# Altium PCB RS485_XBus_Mini.PcbDoc
Units mm, origin at the board's own origin, x right, y up, seen from the top; angles counter-clockwise.
Board outline 48.65 x 24.22 mm, 2 copper layers (Top Layer, Bottom Layer); 65 components, 46 nets, 177 pads, 65 vias.
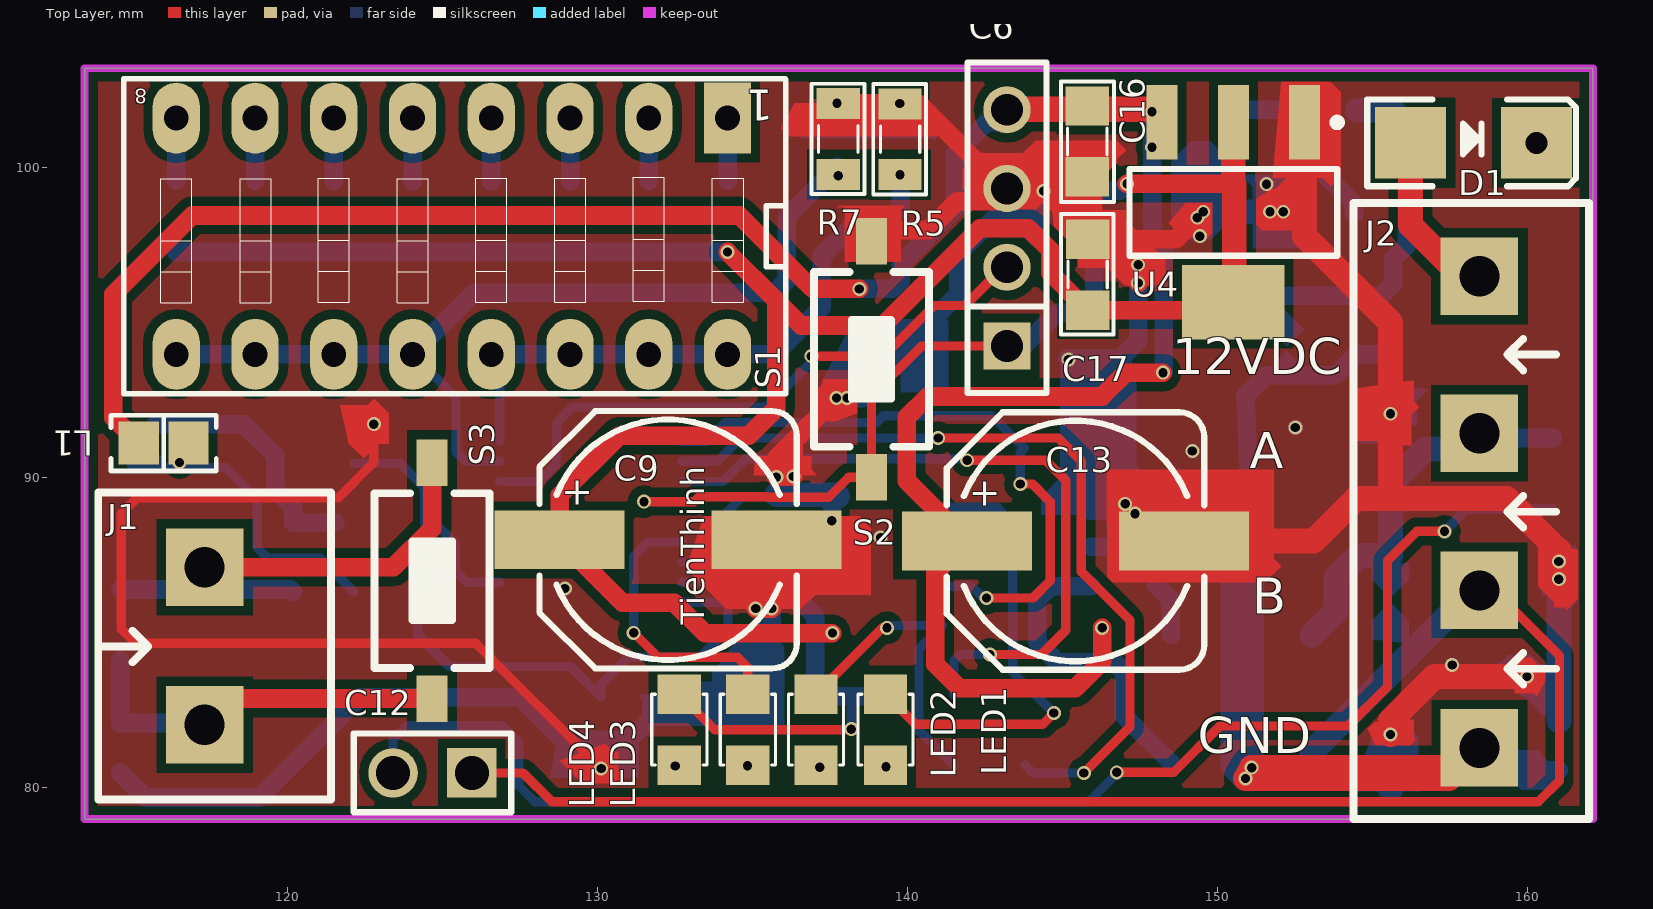
[diagram p0: Top Layer view]
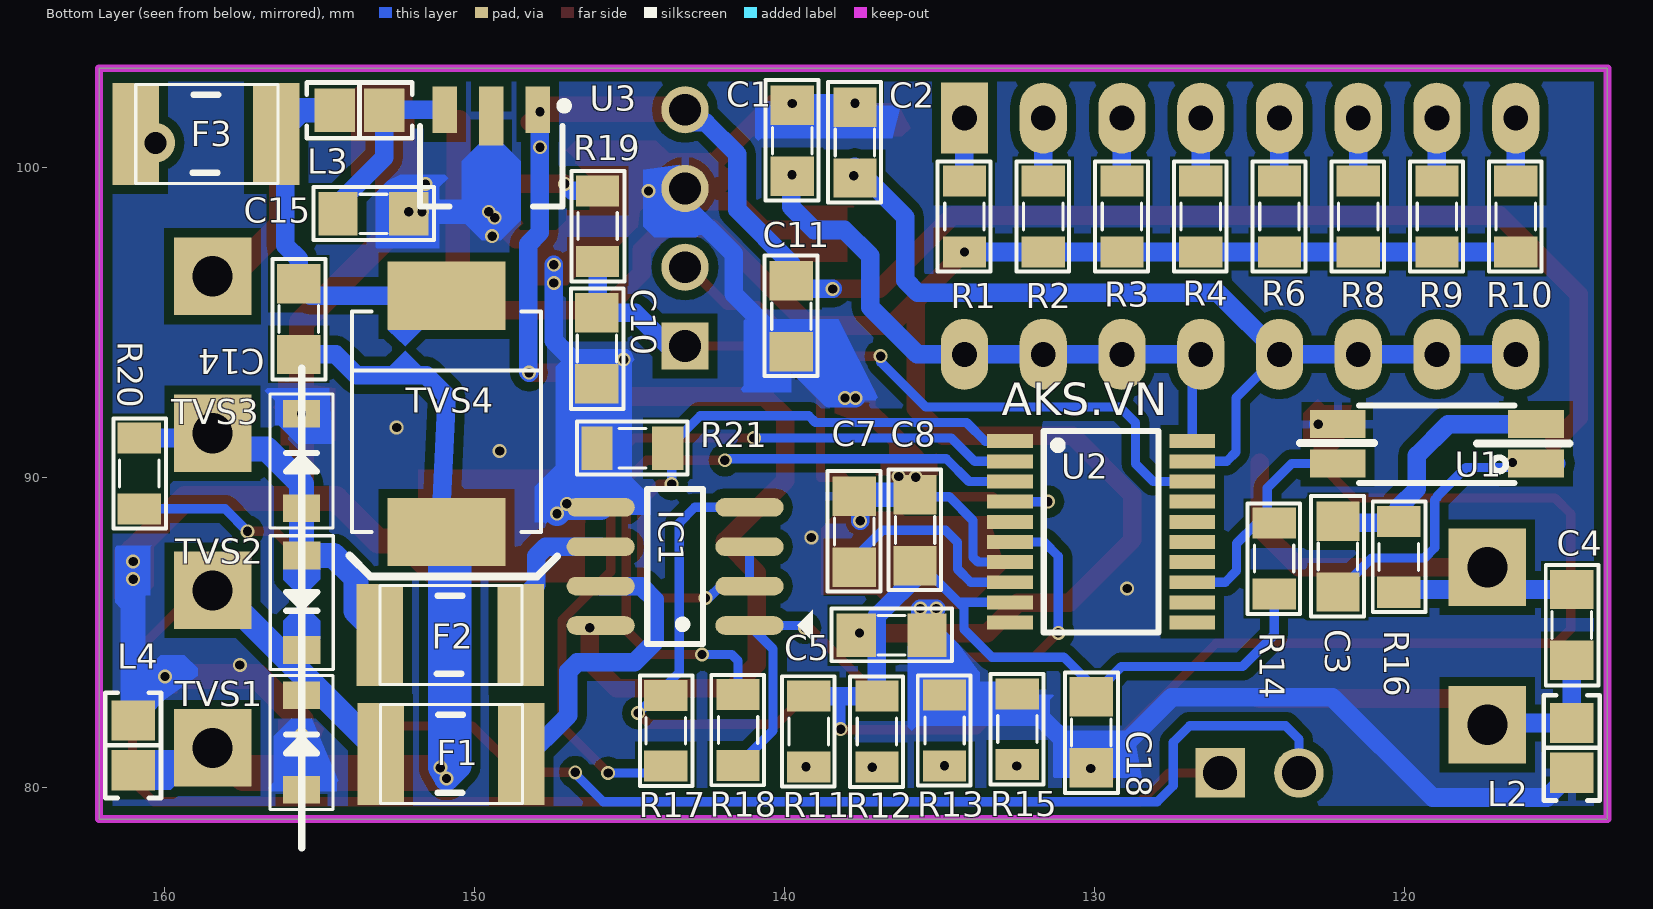
[diagram p1: Bottom Layer view, seen from below]
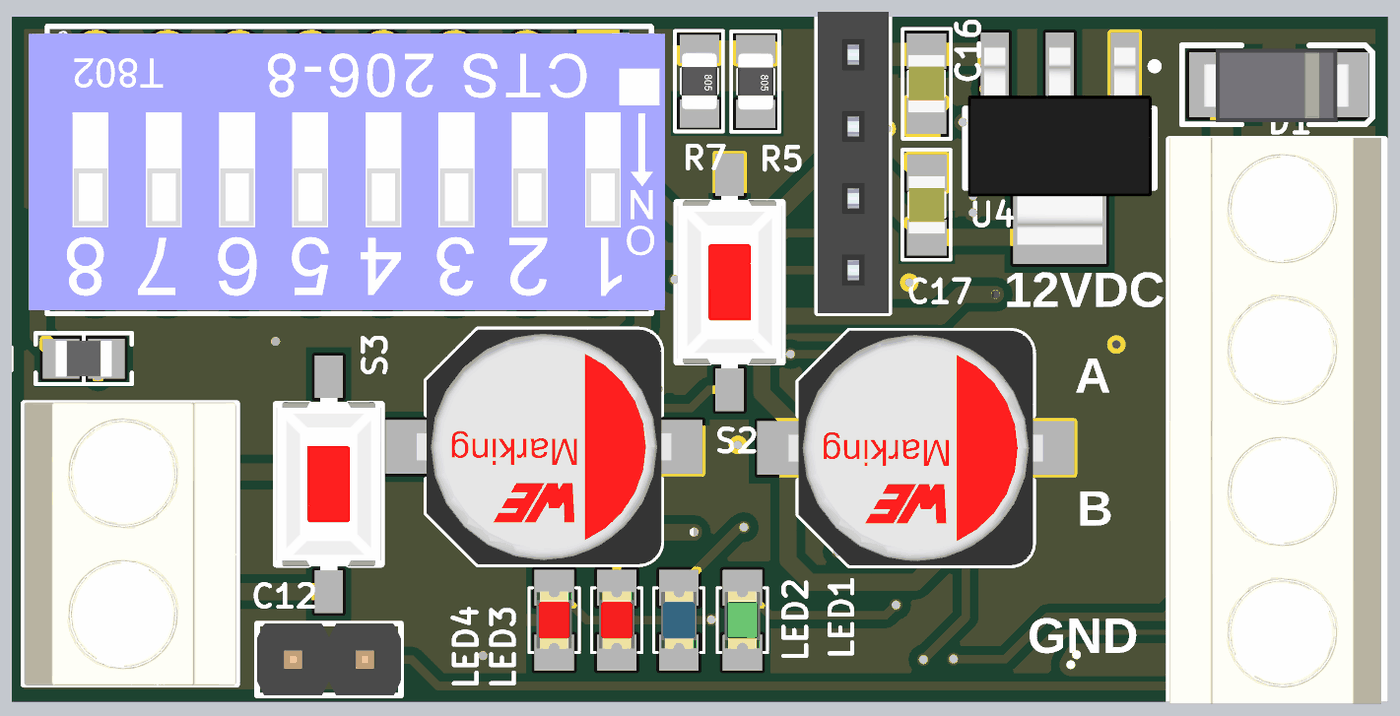
[diagram p2: 3D render of the assembled board from above, using the file's embedded part models]
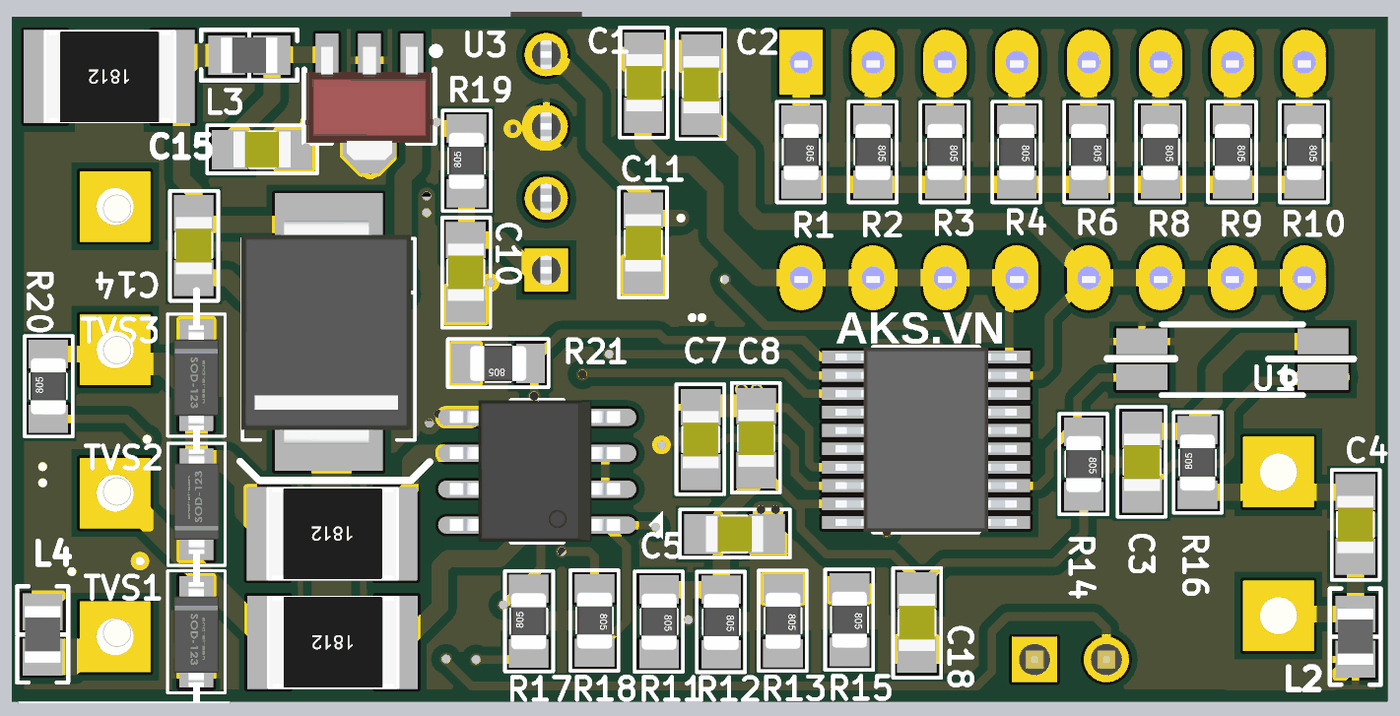
[diagram p3: 3D render of the assembled board from below, using the file's embedded part models]

## Layer stack, top to bottom
Top Solder: solder mask 0.0102, Solder Resist, Dk 3.5
Top Layer: signal copper 0.0356
Dielectric 1: dielectric 0.32, FR-4, Dk 4.8
Bottom Layer: signal copper 0.0356
Bottom Solder: solder mask 0.0102, Solder Resist, Dk 3.5

## Board outline
113.46,78.98 162.108,78.98 162.108,103.199 113.46,103.199

## Design rules (kind name [scope] priority, off if disabled: settings)
Clearance [All] p1: gap=0.2 ignorepadtopadclearanceinfootprint=FALSE
PolygonConnect [All] p1: connectstyle=Relief reliefconductorwidth=0.254 reliefentries=4 polygonreliefangle="90 Angle" airgapwidth=0.254
RoutingVias [All] p1: holewidth=0.3 width=0.45 viastyle="Through Hole" minholewidth=0.3 minwidth=0.45 maxholewidth=0.8 maxwidth=1.27
SolderMaskExpansion [All] p1: expansion=0.102
Width [All] p1: maxlimit=0.8 minlimit=0.3 preferedwidth=0.6
30 further rules are at their usual default settings.

## Components (designator, comment, footprint, x,y, rotation, side; value= is the part's Value field where it differs from the comment)
C1 "104" SM-0805 139.75,100.86 r270 bottom value=103
C2 "104" SM-0805 137.73,100.8 r270 bottom value=103
C3 "105" SM-0805 122.15,87.45 r270 bottom value=103
C4 "105" SM-0805 114.61,85.243 r90 bottom value=103
C5 "105" SM-0805 136.55,84.91 r0 bottom value=103
C6 "JP4" JP4-C1T 143.21,94.24 r90 top
C7 "105" SM-0805 137.75,88.25 r270 bottom value=103
C8 "105" SM-0805 135.79,88.3 r270 bottom value=103
C9 "330uF 16v" WCAP-AS5H_8x10.5 132.28,87.99 r0 top value=330uF
C10 "104" SM-0805 146.053,94.163 r90 bottom value=103
C11 "104" SM-0805 139.78,95.2 r270 bottom value=103
C12 "JP2" JP2-D1T 125.95,80.47 r180 top
C13 "330uF 16v" WCAP-AS5H_8x10.5 145.42,87.95 r0 top value=330uF
C14 "104" SM-0805 155.67,95.11 r90 bottom value=103
C15 "104" SM-0805 153.26,98.5 r0 bottom value=103
C16 "104" SM-0805 145.796,100.838 r90 top locked value=103
C17 "104" SM-0805 145.81,96.54 r270 top locked value=103
C18 "104" SM-0805 130.11,81.78 r90 bottom value=103
D1 "Diode" DIO-SMD-106 158.26,100.79 r180 top locked
F1 "FUSE" RES-SMD-1812 150.49,81.08 r0 bottom
F2 "FUSE" RES-SMD-1812 150.51,84.92 r0 bottom
F3 "FUSE" RES-SMD-1812 158.386,101.08 r0 bottom
IC1 "MAX485" SO-8 143.53,87.13 r0 bottom
J1 "KF2" KF2-5.08 117.33,84.56 r90 top locked
J2 "KF4" KF4-5.08 158.45,81.275 r90 top
L1 "1.5uH" "FER 0805/2012" 116.01,91.11 r180 top
L2 "1.5uH" "FER 0805/2012" 114.61,81.28 r90 bottom
L3 "1.5uH" "FER 0805/2012" 153.71,101.84 r180 bottom
L4 "1.5uH" "FER 0805/2012" 161.01,81.36 r90 bottom
LED1 "LED" SM-LED-0805-Green 139.29,80.72 r90 top locked
LED2 "LED" SM-LED-0805-Blue 137.05,80.72 r90 top locked
LED3 "LED" SM-LED-0805-Red 134.85,83.006 r270 top locked
LED4 "LED" SM-LED-0805-Red 132.64,83.006 r270 top locked
R1 "82k" RES-SMD-0805 134.198,98.415 r270 bottom
R2 "43k" RES-SMD-0805 131.658,98.415 r270 bottom
R3 "22k" RES-SMD-0805 129.118,98.415 r270 bottom
R4 "12k" RES-SMD-0805 126.578,98.415 r270 bottom
R5 "12k" RES-SMD-0805 139.76,100.907 r270 top locked
R6 "82k" RES-SMD-0805 124.038,98.415 r270 bottom
R7 "12k" RES-SMD-0805 137.77,100.92 r270 top locked
R8 "43k" RES-SMD-0805 121.498,98.415 r270 bottom
R9 "22k" RES-SMD-0805 118.958,98.415 r270 bottom
R10 "12k" RES-SMD-0805 116.418,98.415 r270 bottom
R11 "330R" RES-SMD-0805 139.22,81.81 r270 bottom
R12 "330R" RES-SMD-0805 137.02,81.8 r270 bottom
R13 "330R" RES-SMD-0805 134.84,81.84 r270 bottom
R14 "10k" RES-SMD-0805 124.21,87.38 r270 bottom
R15 "330R" RES-SMD-0805 132.49,81.88 r270 bottom
R16 "330R" RES-SMD-0805 120.19,87.44 r90 bottom
R17 "22R" RES-SMD-0805 143.83,81.83 r90 bottom
R18 "22R" RES-SMD-0805 141.5,81.85 r270 bottom
R19 "10k" RES-SMD-0805 146.03,98.103 r90 bottom
R20 "120R" RES-SMD-0805 160.81,90.13 r90 bottom
R21 "10k" RES-SMD-0805 144.91,90.94 r0 bottom
S1 "=partNo" SW-DIP8 134.198,101.59 r180 top locked
S2 "SW" "BUTTON-SMD 2PIN" 138.84,93.81 r270 top
S3 "SW" "BUTTON-SMD 2PIN" 124.67,86.67 r90 top
TVS1 "PSD12C" DIO-SMD-123 155.58,81.45 r270 bottom
TVS2 "PSD12C" DIO-SMD-123 155.57,85.96 r90 bottom
TVS3 "PSD12C" DIO-SMD-123 155.58,90.53 r270 bottom
TVS4 "PSD12C" DIO-SMD-B 150.9,92.05 r270 bottom
U1 "EL3H7 Opto" SSOP4 114.769,93.025 r0 bottom
U2 "STM8S003F3P6" TSOP20 132.963,84.689 r180 bottom
U3 "78XX" SOT-89-321 146.844,102.879 r0 bottom
U4 "AMS1117" SOT223 150.51,98.55 r180 top locked

## Footprints (in the part's own frame and the unit in brackets; to place one, negate y for a bottom-side part, rotate by r counter-clockwise, add the part's x,y. Pads: shape width x height; smd on the part's side, far side on the other; paste and mask are expansions set on the pad)
"BUTTON-SMD 2PIN" [mm] "Switch SMD type"
  rect 1.5x1 smd: 1(-3.8,0) 2(3.8,0)
  silkscreen extent -2.82,-1.85 2.82,1.85, body extent -3.05,-1.85 3.05,1.85, height 2.5
DIO-SMD-106 [mil]
  rect 90x90.55 smd: 1(80,0) 2(-80,0)
  silkscreen extent -130,-55 135,55, body extent -99,-50 106,52, height 95
DIO-SMD-123 [mm]
  rect 0.9x1.2 smd: 1(1.524,0) 2(-1.524,0)
  silkscreen extent -2.16,-1.02 2.16,1.02, body extent -1.76,-0.8 1.94,0.8, height 1.25
DIO-SMD-B [mm] "Magnetic-Core Inductor with Winding Polarity Marking; 2 Leads"
  rect 2.2x3.81 smd: 1(3.81,0) 2(-3.81,0)
  silkscreen extent -3.3,-3.05 3.81,3.05, body extent -3.94,-3.08 3.96,2.92, height 2.13
"FER 0805/2012" [mm] "Chip Ferrite, 2-Leads, Body 2.00x1.20mm, IPC Medium Density"
  rect 1.3x1.4 smd: 1(-0.8,0) 2(0.8,0)
  silkscreen extent -1.7,-0.9 1.7,0.9, body extent -1,-0.64 1,0.64, height 1.26
JP2-D1T [mm] "2 pins, 1 row, straight, gold plating"
  rect 1.6x1.6 hole 1.1: 1(0,0)
  round 1.6 hole 1.1: 2(2.54,0)
  silkscreen extent -1.27,-1.27 3.81,1.27, body extent -1.27,-1.27 3.81,1.27, height 8.54
JP4-C1T [mm] "4 row, straight, gold plating"
  rect 1.52x1.52 hole 1.02: 1(0,0)
  round 1.52 hole 1.02: 2(2.54,0) 3(5.08,0) 4(7.62,0)
  silkscreen extent -1.52,-1.27 9.14,1.27, body extent -1.52,-1.25 9.14,1.25, height 8.51
KF2-5.08 [mm]
  rect 2.5x2.5 hole 1.3: 1(-2.54,0) 2(2.54,0)
  silkscreen extent -4.95,-4.08 4.95,3.43, body extent -5,-4.07 5,3.43, height 10
KF4-5.08 [mm]
  rect 2.5x2.5 hole 1.3: 1(0,0) 2(5.08,0) 3(10.147,0) 4(15.215,0)
  silkscreen extent -2.29,-3.53 17.58,4.06, body extent -2.36,-3.43 17.64,4.07, height 10
RES-SMD-0805 [mil]
  rect 39.37x55 smd: 1(-45,0) 2(45,0)
  silkscreen extent -70,-34 70,33, body extent -39,-25 39,25, height 31
RES-SMD-1812 [mm] "Chip Capacitor, Body 3.2x2.5mm, IPC Medium Density"
  rect 1.5x3.3 smd: 1(-1.996,0) 2(2.54,0)
  silkscreen extent -2.04,-1.6 2.54,1.6, body extent -2,-1.6 2.5,1.6, height 0.6
SM-0805 [mil] "Compoment SMD 80x50mil"
  rect 50x55 smd: 1(-45,0) 2(45,0)
  silkscreen extent -77,-34 76,33, body extent -40,-25 40,25, height 24
SM-LED-0805-Blue [mil]
  rect 50x55 smd: 1(0,0) 2(90,0)
  silkscreen extent 0,-35 90,35, body extent 5,-25 85,25, height 43
SM-LED-0805-Green [mil]
  rect 50x55 smd: 1(0,0) 2(90,0)
  silkscreen extent 0,-35 90,35, body extent 5,-25 85,25, height 43
SM-LED-0805-Red [mil]
  rect 50x55 smd: 1(0,0) 2(90,0)
  silkscreen extent 0,-35 90,35, body extent 5,-25 85,25, height 43
SO-8 [mm] "8-Pin Small Outline Integrated Circuit 1.27 mm Pitch, IPC Medium Density"
  oval 2.2x0.6 smd: 1(-2.4,1.905) 2(-2.4,0.635) 3(-2.4,-0.635) 4(-2.4,-1.905) 5(2.4,-1.905) 6(2.4,-0.635) 7(2.4,0.635) 8(2.4,1.905)
  silkscreen extent -4.44,-2.5 0.9,2.5, body extent -2.93,-2.51 3.08,2.49, height 1.75
SOT223 [mm]
  rect 1x2.4 smd: 1(-2.3,-2.9) 2(0,-2.9) 3(2.3,-2.9)
  rect 3.3x2.4 smd: 4(0,2.9)
  silkscreen extent -3.48,-3.02 3.35,1.4, body extent -3.25,-3.56 3.25,3.4, height 1.68
SOT-89-321 [mm]
  rect 0.8x1.5 smd: 1(4.116,1.019) 3(1.116,1.019)
  rect 0.8x1.9 smd: 2(2.616,1.219)
  Top Layer region: 2.316,2.032 1.666,2.682 1.666,4.582 2.316,5.232 2.916,5.232 3.566,4.582 3.566,2.682 2.916,2.032
  silkscreen extent 0.14,0.77 4.92,4.14, body extent 0.37,0.74 4.87,4.74, height 1.5
SSOP4 [mm]
  rect 1.8x0.9 smd: 1(0.991,2.575) 2(0.991,1.305) 3(7.391,1.305) 4(7.391,2.575)
  silkscreen extent 1.69,0.71 6.69,3.2, body extent 1.52,0.64 6.73,3.3, height 2
SW-DIP8 [mil] "16 PIN, W 300mil, Pin to pin 100mil For Switch"
  rect 60x90 hole 31.5: 1(0,0)
  oval 60x90 hole 31.5: 2(100,0) 3(200,0) 4(300,0) 5(400,0) 6(500,0) 7(600,0) 8(700,0) 9(700,300) 10(600,300) 11(500,300) 12(400,300) 13(300,300) 14(200,300) 15(100,300) 16(0,300)
  silkscreen extent -74,-50 767,350, body extent -93,-40 793,345, height 325
TSOP20 [mm]
  rect 1.475x0.45 smd: 1(0.237,6.481) 2(0.237,5.831) 3(0.237,5.181) 4(0.237,4.531) 5(0.237,3.881) 6(0.237,3.231) 7(0.237,2.581) 8(0.237,1.931) 9(0.237,1.281) 10(0.237,0.631) 11(6.113,0.631) 12(6.113,1.281) 13(6.113,1.931) 14(6.113,2.581) 15(6.113,3.231) 16(6.113,3.881) 17(6.113,4.531) 18(6.113,5.181) 19(6.113,5.831) 20(6.113,6.481)
  silkscreen extent 1.33,0.31 5.02,6.81, body extent -0.02,0.31 6.38,6.81, height 1.2
WCAP-AS5H_8x10.5 [mm] "Polarized capacitors, Aluminum Electrolytic Capacitors, 2-Leads, Body 8x10.5x3.1"
  rect 4.2x1.9 smd: 1(-3.5,0) 2(3.5,0)
  silkscreen extent -4.15,-4.15 4.15,4.15, body extent -4.5,-4.15 4.5,4.15, height 10.5

## Part data
C1 C2 C3 C4 C5 C7 C8 C10 C11 C14 C15 C16 C17 C18: library part CM, "Cap SMD"
C6: "WR-PHD 2.54 mm Angled Socket Header", Manufacturer="Würth Elektronik eiSos GmbH", partNo=613004143121, ComponentLink1 Description=Manufacturer, ComponentLink1URL=http://www.we-online.com, ComponentLink2 Description=Datasheet, ComponentLink2URL=http://katalog.we-online.de/em/datasheet/6130xx143121.pdf, Created by="Karrer Zheng", Created Date="29 March 2013", NoPins=04
C9 C13: library part CAP/330uF/6.3V/865230153006, "https://banlinhkien.vn/goods-2220-tu-nhom-330uf-16v-8x10mm.html", PartNumber=865230153006, RatedVoltage=6.3V, ComponentLink1Description=Manufacturer, ComponentLink1URL=http://www.we-online.de, ComponentLink2Description=Datasheet, ComponentLink2URL=http://katalog.we-online.com/pbs/datasheet/865230153006.pdf, PublishedDate="July 2016", Publisher="Wurth Elektronik", Size=8mmx10.5mm
C12: "WR-PHD 2.54 mm Angled Socket Header", Manufacturer="Würth Elektronik eiSos GmbH", partNo=613002143121, ComponentLink1 Description=Manufacturer, ComponentLink1URL=http://www.we-online.com, ComponentLink2 Description=Datasheet, ComponentLink2URL=http://katalog.we-online.de/em/datasheet/6130xx143121.pdf, Created by="Karrer Zheng", Created Date="29 March 2013", NoPins=02
IC1: "RS232 - RS485 (Same sn75176)"
J1: Manufacturer="Würth Elektronik eiSos GmbH", partNo=691103110002, ComponentLink1 Description=Manufacturer, ComponentLink1URL=http://www.we-online.com, ComponentLink2 Description=Datasheet, ComponentLink2URL=http://katalog.we-online.de/em/datasheet/6911031100xx.pdf, Created by="Karrer Zheng", Created Date="29 October 2013", NoPins=2
J2: Manufacturer="Würth Elektronik eiSos GmbH", partNo=691133710004, ComponentLink1 Description=Manufacturer, ComponentLink1 URL=http://www.we-online.com, ComponentLink2 Description=Datasheet, ComponentLink2 URL=http://katalog.we-online.de/em/datasheet/6911337100xx.pdf, Created by="Baojun Chen", Created Date=4-Aug-15, NoPins=4
L1 L2 L3 L4: library part Inductor, "SMT Inductor"
R1 R2 R3 R4 R5 R6 R7 R8 R9 R10 R11 R12 R13 R14 R15 R16 R17 R18 R19 R20 R21: library part R, "Resistor R1/4W"
S1: library part SWDIP8, "WS-DITV 2.54 mm small compact THT flat actuator with top tape", Manufacturer="Wurth Elektronik", Part No.=418127160908, ComponentLink1 Description=Manufacturer, ComponentLink1URL=http://www.we-online.com, ComponentLink2 Description=Datasheet, ComponentLink2URL=http://katalog.we-online.de/em/datasheet/4181271609xx.pdf, Created by="Baojun Chen", Created Date=Dec.2015, Pole=08
S2 S3: library part SW-Button, "Switch-Button", LatestRevisionDate=17-Jul-2002, LatestRevisionNote="Re-released for DXP Platform.", PackageReference=SPST-2, Published=24-Mar-1999, Publisher="Altium Limited"
TVS1 TVS2 TVS3 TVS4: library part "Diode TVS"
U2: "MCU 8BIT 8KB FLASH TSSOP20"
U3: library part LM78XX
U4: library part AMS117

## Via types
v1: diameter 0.45, hole 0.3, Top Layer to Bottom Layer, tented both sides, 54 vias
v2: diameter 0.45, hole 0.3, Top Layer to Bottom Layer, 10 vias
v3: diameter 1.27, hole 0.711, Top Layer to Bottom Layer, tented both sides, 1 vias

## Nets (pads, with @x,y where several pads share a name; then routed paths per layer and width w, separated by ;. In a path a pad name is that pad's centre, name@x,y a point inside that pad or via, vN(x,y) a via of type N, cw(c..) or ccw(c..) an arc to the next point about the centre after c; other vN are vias at no path point)
+3.3V: C5.2 C8.2 C9.1 C17.2 C18.2 LED4.1 R1.2 R2.2 R3.2 R4.2 R6.2 R8.2 R9.2 R10.2 R11.1 R12.1 R14.2 R19.2 U2.9 U4.2 U4.4 | length 102.8
  Top Layer w0.3: LED4.1 133.786,81.86 138.17,81.86 v1(138.19,81.88)
  Top Layer w0.6: v1(134.198,97.272) 135.84,95.63 ; v1@137.57,84.97 133.47,84.97 132.48,85.96 130.81,85.96 C9.1 128.78,89.42 130.7,91.34 134.88,91.34 135.77,92.23 135.77,95.56 135.84,95.63 ; v1(147.08,99.47) 150.51,99.47 ; U4.4 150.257,95.397 C17.2 144.6,96.607 144.6,97.34 143.9,98.04 142.34,98.04 139.2,94.9 136.57,94.9 135.84,95.63
  Top Layer w0.8: U4.4 150.54,95.68 150.54,99.44 150.51,99.47 U4.2
  Bottom Layer w0.3: R14.2 124.21,84.92 125.23,83.9 129.133,83.9 C18.2 130.11,83.32 130.99,84.2 133.31,84.2 134.21,85.1 134.21,85.797 134.383,85.97 ; U2.9 134.383,85.97 ; C8.2@135.56,87.147 134.383,85.97 ; v1(138.19,81.88) 138.19,82.893
  Bottom Layer w0.6: R10.2 R9.2 R8.2 R6.2 R4.2 R3.2 R2.2 v1(134.198,97.272) ; C8.2@135.56,87.147 135.56,86.99 137.02,85.53 R12.1 R11.1@139.21,82.943 ; R11.1 R11.1@139.21,82.943 ; R11.1@139.31,82.953 139.3,82.943 R11.1@139.21,82.943 ; R19.2 146.846,99.246
  other v1: 137.58,84.98
+5V: C6.4 C11.1 C13.1 C16.2 IC1.8 L1.2 U3.3 U4.3 | length 83.5
  Top Layer w0.6: L1.2 114.39,91.93 114.39,95.91 116.93,98.45 134.57,98.45 136.94,96.08 v1(138.45,96.08) ; C6.4@143.34,101.45 143.75,101.86 143.871,101.981 C16.2 147.679,101.981 147.8,101.86 U4.3 ; v1(146.28,85.15) 146.28,84.07 145.41,83.2 141.68,83.2 140.9,83.98 140.9,86.93 C13.1 139.98,89.89 139.98,91.94 140.65,92.61 146.27,92.61 ; 146.28,92.6 146.27,92.61 ; v1(148.24,93.38) 147.04,93.38 146.27,92.61
  Top Layer w0.8: C6.4 143.75,101.86 U4.3@147.8,101.86
  Bottom Layer w0.6: v1(138.45,96.08) 139.517,96.08 C11.1 139.78,96.89 141.52,98.63 141.52,100.42 142.55,101.45 C6.4@143.34,101.45 ; U3.3 v1(147.89,101.79) v1(147.89,100.65) 147.89,97.905 148.27,97.525 148.27,93.41 v1(148.24,93.38)
DIP_SW0: C1.2 R5.2 S1.13 S1.14 S1.15 S1.16 U2.20 | length 20.4
  Bottom Layer w0.3: S1.13 126.85,93.698 U2.20 ; 127.69,93.97 127.77,93.89
  Bottom Layer w0.6: S1.13 127.69,93.97 S1.14 S1.15 S1.16 135.72,93.97 137.24,95.49 137.24,97.15 138.07,97.98 139.04,97.98 139.79,98.73 C1.2@139.79,99.994
  other v1: 139.76,99.764
DIP_SW1: C2.2 R7.2 S1.9 S1.10 S1.11 S1.12 U2.19 | length 31.2
  Top Layer w0.3: S1.12@124.038,93.122 S1.12 ; v1(137.77,99.73) R7.2
  Bottom Layer w0.3: S1.12 125.44,92.568 125.44,90.82 125.74,90.52 U2.19
  Bottom Layer w0.6: S1.9 S1.10 S1.11 S1.12 126.028,95.96 135.71,95.96 136.11,96.36 136.11,98.397 C2.2@137.73,100.017
ERROR: LED3.1 U2.6 | length 9.8
  Top Layer w0.3: v1(131.17,84.99) 131.96,84.2 134.52,84.2 134.85,83.87 LED3.1 LED3.1@134.83,83.026 ; LED3.1@134.79,83.066 LED3.1@134.83,83.026 ; LED3.1@134.83,82.57 LED3.1@134.83,83.026
  Bottom Layer w0.3: v1(131.17,84.99) 131.17,87.46 131.63,87.92 U2.6
GND: C1.1 C2.1 C5.1 C6.3 C7.1 C8.1 C9.2 C10.1 C11.2 C13.2 C15.1 C16.1 C17.1 C18.1 IC1.5 L2.1 L4.2 R5.1 R7.1 R13.1 R15.1 R21.2 S2.1 TVS1.1 TVS3.2 U1.3 U2.7 U3.2 U4.1 | length 170
  Top Layer w0.3: v1(122.79,91.72) 122.79,90.49 121.64,89.34 115.15,89.34 114.64,88.83 114.64,85.11 115.1,84.65 126.08,84.65 v1(130.12,80.61)
  Top Layer w0.6: v1(135.102,85.77) v1(135.62,85.77) 135.62,87.33 135.37,87.58 C9.2 136.39,88.6 C9.2@137.53,88.6 ; v1(135.77,90.01) v1@135.77,90.03 ; C9.2@137.38,88.45 C9.2@137.53,88.6 ; v1(137.56,88.6) C9.2@137.53,88.6 ; R7.1 v1(139.747,102.063) R5.1@139.76,102.063 ; v1(138.05,92.56) v1(137.71,92.56) 136.33,91.18 ; S2.1@139.17,97.98 140.67,97.98 141.6,98.91 C6.3@143.34,98.91 ; R5.1 140.37,102.05 143.34,99.08 C6.3@143.34,98.91 ; v2@144.39,99.18 v2(144.39,99.24) ; v1(147.02,89.15) v1(147.34,88.83) 148.22,87.95 C13.2 C13.2@149.53,87.95 ; v1(147.44,96.27) v1(147.44,96.86) 147.44,97.673 147.43,97.683 ; v1(149.54,98.57) v1(149.35,98.38) 148.653,97.683 147.43,97.683 ; v1@135.77,90.03 v1(136.32,90.03) 136.33,90.04 136.33,91.18 ; v1@135.77,90.03 135.77,90.62 136.33,91.18 ; C6.3@143.34,98.91 144.125,99.695 C16.1 145.796,97.697 C17.1 147.43,97.683
  Top Layer w0.8: C13.2@149.53,87.95 153.1,87.95 154.47,89.32 155.51,89.32 ; v1(152.12,98.57) v1(151.69,98.57) 152.81,99.69 ; U4.1 152.81,99.69 ; v1(155.58,81.711) 155.58,82.16 157,83.58 v1(159.98,83.58) ; v1(161.01,86.72) v1(161.01,87.29) 161.01,87.64 159.33,89.32 155.51,89.32 ; 152.81,99.69 152.81,97.77 155.58,95 v1(155.58,92.054) 155.58,89.39 155.51,89.32
  Bottom Layer w0.3: U2.7 133.76,87.27 133.92,87.43 133.92,88.61 134.683,89.373 C7.1@137.54,89.373
  Bottom Layer w0.6: L2.1 115.413,79.677 119.097,79.677 122.33,82.91 127.51,82.91 129.783,80.637 C18.1 132.49,83.017 R15.1 ; U1.3 v1(122.79,91.72) ; R13.1@134.8,83.023 135.407,83.63 C5.1 135.37,84.947 135.62,85.197 v1(135.62,85.77) v1(135.102,85.77) ; v1(137.56,88.6) 137.56,89.203 C7.1 ; C2.1@137.7,102.073 139.737,102.073 v1(139.747,102.063) ; v1(137.71,92.56) v1(138.05,92.56) 138.54,92.56 139.91,93.93 139.781,94.058 141.64,95.917 141.64,97.21 C6.3@143.34,98.91 ; C2.1 v2(137.73,102.07) ; R21.2@146.053,90.5 R21.2 C10.1 147.44,94.407 v1(147.44,96.27) v1(147.44,96.86)
  Bottom Layer w0.8: R15.1 R13.1@134.8,83.023 ; C8.1 137.7,89.443 C7.1 ; R21.2@146.053,90.5 146.053,89.158 IC1.5 147.135,89.035 v1(147.34,88.83) ; v1(149.54,98.57) v1(151.69,98.57) ; TVS1.1 v1(155.58,81.711) ; v1(159.98,83.58) 160.81,83.58 161.01,83.38 ; L4.2 161.01,83.38 ; v1(161.01,87.29) v1(161.01,86.72) 161.01,83.38
  other v2: 157.57,83.95 128.95,86.42 139.135,88.06 149.19,90.85 152.51,91.61 145.19,93.798 149.43,97.78 151.58,99.46
GND_IN: C14.1 J2.1 L4.1 TVS4.1 | length 44.8
  Top Layer w0.8: J2.1@158.977,81.802 J2.1 J2.1@157.835,80.66 ; J2.1@157.835,80.66 v1(151.1,80.64) v1(150.9,80.288) 157.463,80.288 J2.1@157.835,80.66
  Bottom Layer w0.6: TVS4.1@151.1,88.22 151.099,88.249 150.9,92.63 151.56,93.29 153.8,93.29 154.477,93.967 C14.1 ; J2.1 159.165,80.56 L4.1
  Bottom Layer w0.8: 150.5,80.688 v1(150.9,80.288) v1(151.1,80.64) 151.1,88.22 150.976,88.132 150.5,87.796 150.5,80.688
HID_P2_3: U2.12
HID_P2_4: U2.11
IN_DRY: C4.2 J1.2 R16.1 S3.2 | length 15.6
  Top Layer w0.6: J1.2 123.42,87.1 124.67,88.35 S3.2
  Bottom Layer w0.6: C4.2 120.101,86.386 R16.1
INPUT1: R14.1 U1.4 U2.13 | length 7.5
  Bottom Layer w0.3: U1.4 123.64,90.45 124.43,89.66 124.43,88.523 124.767,88.523 125.42,87.87 125.42,86.99 125.79,86.62 U2.13
LINE_METER: U2.14
MAX_DIR: IC1.2 IC1.3 R21.1 U2.1 | length 21.9
  Top Layer w0.3: v1(142.55,86.11) 144.05,86.11 144.61,86.67 144.61,89.21 144.03,89.79 v1(143.64,89.79)
  Bottom Layer w0.3: U2.1 133.53,91.17 134.13,91.77 139,91.77 139.22,91.99 142.717,91.99 R21.1 143.64,90.813 v1(143.64,89.79) ; IC1.3 IC1.2 142.065,86.495 142.45,86.11 v1(142.55,86.11)
NetC3_1: C3.1 R16.2 U1.2 | length 8
  Bottom Layer w0.6: U1.2 118.59,91.72 119.603,90.707 119.603,89.63 120.19,89.043 R16.2 ; R16.2@120.19,88.54 121.527,88.54 C3.1@121.54,88.553
NetC3_2: C3.2 L1.1 U1.1 | length 9.7
  Bottom Layer w0.3: U1.1 115.89,90.32 118.02,90.32 118.953,89.387 118.953,89.361 119.03,89.284 119.03,87.73 119.36,87.4 121.057,87.4 C3.2
  Bottom Layer w0.6: U1.1@115.11,90.45 U1.1
  other v1: 116.52,90.48
NetC4_1: C4.1 J1.1 L2.2 S3.1 | length 12.5
  Top Layer w0.6: J1.1 118.18,82.87 S3.1
  Bottom Layer w0.6: C4.1 L2.2 117.27,82.08 J1.1
NetC12_2: C12.2 R20.1 | length 46.8
  Top Layer w0.3: v1(146.75,80.49) 148.59,80.49 150.08,81.98 154.21,81.98 155.48,83.25 155.48,87.31 156.43,88.26 v1(157.32,88.26)
  Bottom Layer w0.3: C12.2 123.41,81.56 123.84,81.99 126.93,81.99 127.463,81.457 127.463,80.058 127.982,79.538 129.757,79.538 145.848,79.538 146.75,80.44 v1(146.75,80.49) ; v1(157.32,88.26) 158.047,88.987 R20.1
NetC15_2: C15.2 L3.2 U3.1 | length 5.9
  Bottom Layer w0.6: U3.1 152.89,101.86 L3.2 152.91,100.32 154.403,98.827 C15.2
NetD1_1: D1.1 J2.4 | length 5.7
  Top Layer w0.8: D1.1 156.228,98.128 J2.4@158.369,95.987
NetD1_2: D1.2 F3.2
  other v3: 160.292,100.79
NetF1_1: F1.1 IC1.7 | length 10.1
  Bottom Layer w0.6: IC1.7 144.625,86.495 144.18,86.05 144.18,84.7 144.84,84.04 146.68,84.04 146.97,83.75 146.97,82.334 F1.1@148.514,80.79
NetF2_1: F2.1 IC1.6 | length 5
  Bottom Layer w0.6: IC1.6 147.705,87.765 148.01,87.46 148.01,86.54 148.495,86.055 148.495,84.939 F2.1
NetLED1_1: LED1.1 R11.2
  other v1: 139.31,80.667
NetLED2_1: LED2.1 R12.2
  other v1: 137.17,80.657
NetLED3_2: LED3.2 R13.2
  other v1: 134.84,80.697
NetLED4_2: LED4.2 R15.2
  other v1: 132.51,80.69
NetR1_1: R1.1 S1.1 | length 2
  Bottom Layer w0.6: R1.1 S1.1
NetR2_1: R2.1 S1.2 | length 2
  Bottom Layer w0.6: R2.1 S1.2
NetR3_1: R3.1 S1.3 | length 2
  Bottom Layer w0.6: R3.1 S1.3
NetR4_1: R4.1 S1.4 | length 2
  Bottom Layer w0.6: R4.1 S1.4
NetR6_1: R6.1 S1.5 | length 2
  Bottom Layer w0.6: R6.1 S1.5
NetR8_1: R8.1 S1.6 | length 2
  Bottom Layer w0.6: R8.1 S1.6
NetR9_1: R9.1 S1.7 | length 2
  Bottom Layer w0.6: R9.1 S1.7
NetR10_1: R10.1 S1.8 | length 2
  Bottom Layer w0.6: R10.1 S1.8
NetR17_1: R17.1 U2.2 | length 26.8
  Top Layer w0.3: v1(140.99,91.27) 144.86,91.27 145.61,90.52 145.61,86.96 147.18,85.39 147.18,81.96 v1(145.69,80.47)
  Bottom Layer w0.3: U2.2 133.87,90.52 134.62,91.27 v1(140.99,91.27) ; R17.1@143.79,80.727 R17.1 144.047,80.47 v1(145.69,80.47)
NetR18_1: R18.1 U2.3 | length 22.9
  Top Layer w0.3: v1(141.925,90.555) 144.455,90.555 145.11,89.9 145.11,85.08 144.32,84.29 v1(142.66,84.29)
  Bottom Layer w0.3: U2.3 134.05,89.87 134.785,90.605 141.875,90.605 v1(141.925,90.555) ; R18.1 141.5,84.09 141.7,84.29 v1(142.66,84.29)
RC522_RST: C6.1 C10.2 R19.1 S2.2 U2.4 | length 21.6
  Top Layer w0.3: v1(131.5,89.22) 133.12,89.22 133.28,89.38 135.481,89.38 135.501,89.36 137.46,89.36 138.11,90.01 S2.2 138.84,92.63 139.62,93.41 139.627,93.41 140.457,94.24 C6.1
  Bottom Layer w0.3: v1(131.5,89.22) U2.4
  Bottom Layer w0.6: C6.1@143.34,93.83 144.816,95.306 C10.2 146.03,95.329 R19.1
RC522_SDA: U2.10
RELAY: U2.5
RFID_EN: C6.2 U2.18 | length 20.1
  Top Layer w0.3: v1(136.9,93.91) 139.23,93.91 140.865,95.545 141.855,95.545 142.68,96.37 C6.2@143.34,96.37
  Bottom Layer w0.3: U2.18 128.11,89.87 128.68,90.44 128.68,91.76 129.19,92.27 135.45,92.27 136.9,93.72 v1(136.9,93.91)
RJ45-1: F2.2 J2.3 R20.2 TVS2.1 TVS3.1 | length 13
  Bottom Layer w0.6: J2.3@158.37,91.257 158.386,91.273 R20.2
  Bottom Layer w0.8: F2.2 153.825,85.695 153.825,85.738 153.825,86.761 154.548,87.485 155.571,87.485 155.575,87.481 155.575,88.011 155.575,89.789 156.705,90.919 J2.3@159.144,90.919
RJ45-2: C12.1 F1.2 J2.2 TVS1.2 TVS2.2 | length 51
  Top Layer w0.3: C12.1 127.6,80.47 128.532,79.538 144.09,79.538 160.348,79.538 161.03,80.22 161.03,84.25 158.925,86.355 J2.2
  Bottom Layer w0.8: F1.2@153.05,80.79 153.05,81.15 158.09,86.19 J2.2@158.37,86.19
RS485_RX: IC1.4 LED1.2 R17.2 | length 15.1
  Top Layer w0.3: LED1.2 140.256,82.04 144.36,82.04 v1(144.72,82.4)
  Bottom Layer w0.3: IC1.4 142.895,89.035 143.4,88.53 143.4,83.72 v1(144.72,82.4)
RS485_TX: IC1.1 LED2.2 R18.2 | length 10.3
  Top Layer w0.3: LED2.2 139.194,85.15 v1(139.34,85.15)
  Bottom Layer w0.3: v1(139.34,85.15) 139.415,85.225 IC1.1 140.37,84.465 140.37,81.837 R18.2
VCAP: C7.2 U2.8 | length 6.6
  Bottom Layer w0.3: U2.8 133.99,86.62 134.42,87.05 134.42,87.91 134.81,88.3 136.84,88.3 137.54,87.6 C7.2@137.54,87.317
VIN: C14.2 F3.1 L3.1 TVS4.2 | length 12.7
  Bottom Layer w0.6: TVS4.2 155.277,95.86 C14.2 155.67,97.05 156.1,97.48 156.1,100.79 F3.1
  Bottom Layer w0.8: TVS4.2 TVS4.2@151.24,96.2 ; L3.1 155.63,101.84 F3.1
pads on no net: U2.15 U2.16 U2.17

## Polygon pours and split planes (outlines as drawn)
GND on Bottom Layer (solid, pour order 24): 113.46,103.199 113.46,78.98 162.108,78.98 162.108,103.199
GND on Top Layer (solid, pour order 26): 113.46,103.199 113.46,78.98 162.108,78.98 162.108,103.199

## Keep-outs
Keep-Out Layer:
  the board outline again, w0.254

## Other copper
Top Layer:
  region net GND: 149.834,98.858 148.975,98.858 148.975,98.787 148.83,98.642 149.588,97.884 149.834,97.884
  region net GND: 155.087,81.358 155.09,81.361 156.221,81.361 156.4,81.54 156.33,81.61 156.33,82.19 155.73,82.19 155.53,82.39 155.25,82.11 155.07,82.11 154.85,81.89
  region: 155.155,81.37
  region net GND: 160.571,83.446 160.571,83.714 160.105,84.18 159.5,84.18 159.5,83.518 159.44,83.458 159.58,83.318 159.58,83.04 160.21,83.04 160.3,82.95
  region net GND: 160.348,87.93 160.348,86.492 160.86,85.98 160.86,85.81 161.2,85.81 161.27,85.74 161.62,86.09 161.62,87.66
  region net GND: 151.246,98.979 151.246,98.161 151.42,97.987 151.42,97.98 152.455,97.98 152.465,97.97 152.645,98.15 152.86,98.15 152.86,98.521 152.071,99.31 151.75,99.31
  region net GND: 152.056,102.763 153.633,102.763 153.98,102.417 153.98,99.73 153.66,99.41 153.4,99.67 151.79,99.67
  region net GND: 144.083,98.615 144.056,98.642 142.292,98.642 142.292,98.828 141.78,99.34 141.78,99.97 141.87,99.97 142.39,100.49 142.43,100.45 143.72,100.45 144.13,100.86 146.75,100.86 147.05,100.56 146.749,100.258 146.749,100.111 146.721,100.111 146.29,99.68 146.29,97.9 145.338,97.9 144.38,98.858
  region net GND: 148.975,98.858 149.82,98.014 149.834,98.014 149.834,97.884 149.66,97.71 149.61,97.76 148.87,97.76 148.43,98.2
  region net GND: 144.74,98.065 144.745,98.065 145.49,97.32 145.49,96.77 146.437,96.77 147.007,96.2 148.32,96.2 148.32,97.02 147.04,98.3 147.04,98.62 144.751,98.62 144.651,98.72
  region net GND: 154.47,92.87 154.49,92.85 154.49,91.18 155.236,91.18 155.546,90.87 155.716,91.04 156.254,91.04 156.254,92.024 156.5,92.27 156.33,92.44 156.33,93.13
  region net GND: 146.439,86.78 146.6,86.619 151.529,86.619 152.05,87.14 151.81,87.38 151.81,90.24 146.46,90.24 146.42,90.28
  region net GND: 128.78,80.87 129.5,80.15 129.5,80.13 130.603,80.13 130.85,80.377 130.68,80.547 130.68,81.16 130.49,81.16 130.24,81.41
  region net GND: 133.426,88.749 138.44,88.749 138.82,88.368 138.82,86.22 137.02,86.22 136.56,85.76 134.16,85.76 132.86,87.06
  region net GND: 132.86,88
  region net GND: 137.97,96.97 137.98,96.96 139.79,96.96 139.79,98.637 139.91,98.757 139.899,98.768 137.787,98.768 137.75,98.731 137.771,98.71 137.98,98.71
  region net GND: 135.04,90.07 137.05,90.07 137.07,90.09 136.89,90.27 136.89,90.68 135.209,90.68 135.114,90.775
  region net GND: 138.381,92.07 138.381,93.069 138.29,93.16 137.26,93.16 137.26,93.01 137.07,92.82 137.07,92.188 137.448,91.81 137.68,91.81
  region net GND: 138.35,92.936
  region net GND: 138.51,92.946
  region net GND: 121.7,92.33 122.59,92.33 122.8,92.54 123.27,92.07 123.27,91.089 122.929,91.089 122.46,90.62 121.96,91.12 121.96,91.195
  region net GND: 136.36,102.063 140.677,102.063 141.28,101.46 141.28,101 136.2,101 135.93,101.27
Bottom Layer:
  region net GND: 160.41,87.81 160.45,87.77 160.45,86.2 160.96,86.2 161.39,85.77 161.59,85.97 161.59,87.74 161.54,87.79
  region net GND: 128.76,81.84 128.77,81.83 130.99,81.83 131.33,81.49 131.33,80.35 131.3,80.32 128.48,80.32
  region net GND: 134.401,84.642 134.402,84.642 135.17,85.41 136.022,84.558 136.022,81.961 135.89,81.83 135.732,81.988 131.44,81.988 131.44,82.833 131.32,82.953 131.357,82.99 133.72,82.99 133.79,83.06 133.7,83.15 133.7,83.72 133.78,83.8
  region net GND: 160,82.825 160.495,82.33 161.33,82.33 161.33,83.06 160.12,84.27 159.36,84.27 158.93,83.84 158.93,83.61
  region net GND: 155.257,82.224 155.903,82.224 156.48,81.647 156.48,80.17 156.66,79.99 156.55,79.88 154.44,79.88 154.44,80.17 154.39,80.22
  region net GND: 154.68,92.88 156.68,92.88 156.76,92.8 156.434,92.474 156.434,91.686 156.307,91.686 155.711,91.089 154.59,91.089
  region net GND: 152.795,99.57 153.18,99.185 153.18,97.44 153.19,97.43 153.16,97.4 151.13,97.4 151.13,99.37 150.85,99.65 150.964,99.764 152.4,99.764
  region net GND: 144.84,93.79 144.925,93.705 144.925,89.985 144.31,89.37 144.31,88.79 147.412,88.79 147.698,88.504 147.744,88.55 148.05,88.55 148.05,89.7 146.91,90.84 146.91,94.14 145.05,94.14 144.94,94.03
  region net GND: 138.26,95.11 141.21,95.11 141.28,95.04 138.73,92.49 137.06,92.49 137.06,92.52 137,92.58
  region net GND: 159.98,83.58 159.99,83.57 159.99,83.15 160.47,82.67 160.82,82.67 160.82,82.79 160.99,82.96 160.81,83.14 160.81,83.58
  region net GND_IN: 160.43,81.11 160.34,81.2 159,81.2 159,80.72 159.8,79.92 160.68,79.92 161.08,80.32
  region net VIN: 152.24,94.23 151.64,94.83 151.64,95.68 151.88,95.68 152.8,94.76
  region: 151.38,94.95
  region net GND_IN: 151.674,93.516 152.239,94.081 152.966,93.364
  region net RJ45-2: 154.97,84.784 154.97,85.37 155.57,85.97 156.17,85.37 156.17,84.634
  region net RJ45-1: 155.57,86.12 154.97,86.72 154.97,87.24 156.13,87.24 156.17,87.2 156.17,86.7
  region net GND: 146.78,93.76 146.78,93.747 145.926,92.893 146.057,92.762 146.057,89.162 147.248,89.162 147.38,89.03 147.38,93.57 147.15,93.8
  region net GND: 143.4,100.08 143.4,98.88 142.62,98.1 142.62,97.83 142.77,97.83 142.85,97.75 144.2,97.75 144.55,98.1 144.55,99.93
  region net GND: 136.26,102 136.27,101.99 140.94,101.99 140.94,100.949 140.843,100.852 140.755,100.94 136.52,100.94
  region net GND: 139.81,94.03 139.79,94.01 139.79,92.75 141.33,92.75 141.42,92.84 141.31,92.95 141.31,95.06 141.27,95.1

## Silkscreen, mask and mechanical layers (free items; w line width, h text height)
Top Overlay:
  text "8" at 115.48,102.69 h0.8 r180
  text "12VDC" at 148.54,92.94 h2
  text "A" at 151.04,89.91 h2
  text "TienThinh" at 133.71,85.25 h1.3 r90
  text "B" at 151.12,85.21 h2
  text "GND" at 149.37,80.71 h2
Bottom Overlay:
  lines w0.254: 114.68,91.1 117.67,91.1 ; 120.99,91.11 123.38,91.11 ; 147.33,87.46 147.98,86.81 153.36,86.81 154.03,87.48 ; 155.57,78.06 155.57,85.803 155.57,93.51
  text "AKS.VN" at 132.99,91.65 h1.8
Bottom Solder:
  region: 155.85,86.53 155.85,85.5 155.84,85.51 155.29,85.51 155.29,86.54
  region: 152.06,94.48 152.05,94.47 152.05,93.79 152.48,93.79 152.48,94.48

## Text inside footprints (layer, text, board x,y; h text height)
C9: Top Overlay "+" at 129.867,89.895 h0.89 r180
C13: Top Overlay "+" at 143.007,89.855 h0.89 r180
S1: Top Overlay "1" at 135.67,102.51 h1 r180